# Altium PCB Copy of Arduino_Shield.PcbDoc
Units mil, origin at the board's own origin, x right, y up, seen from the top; angles counter-clockwise.
Board outline 2701 x 2043 mil, 2 copper layers (Top Layer, Bottom Layer); 21 components, 35 nets, 104 pads, 0 vias.
Unrouted connection lines stored in the file: 21.
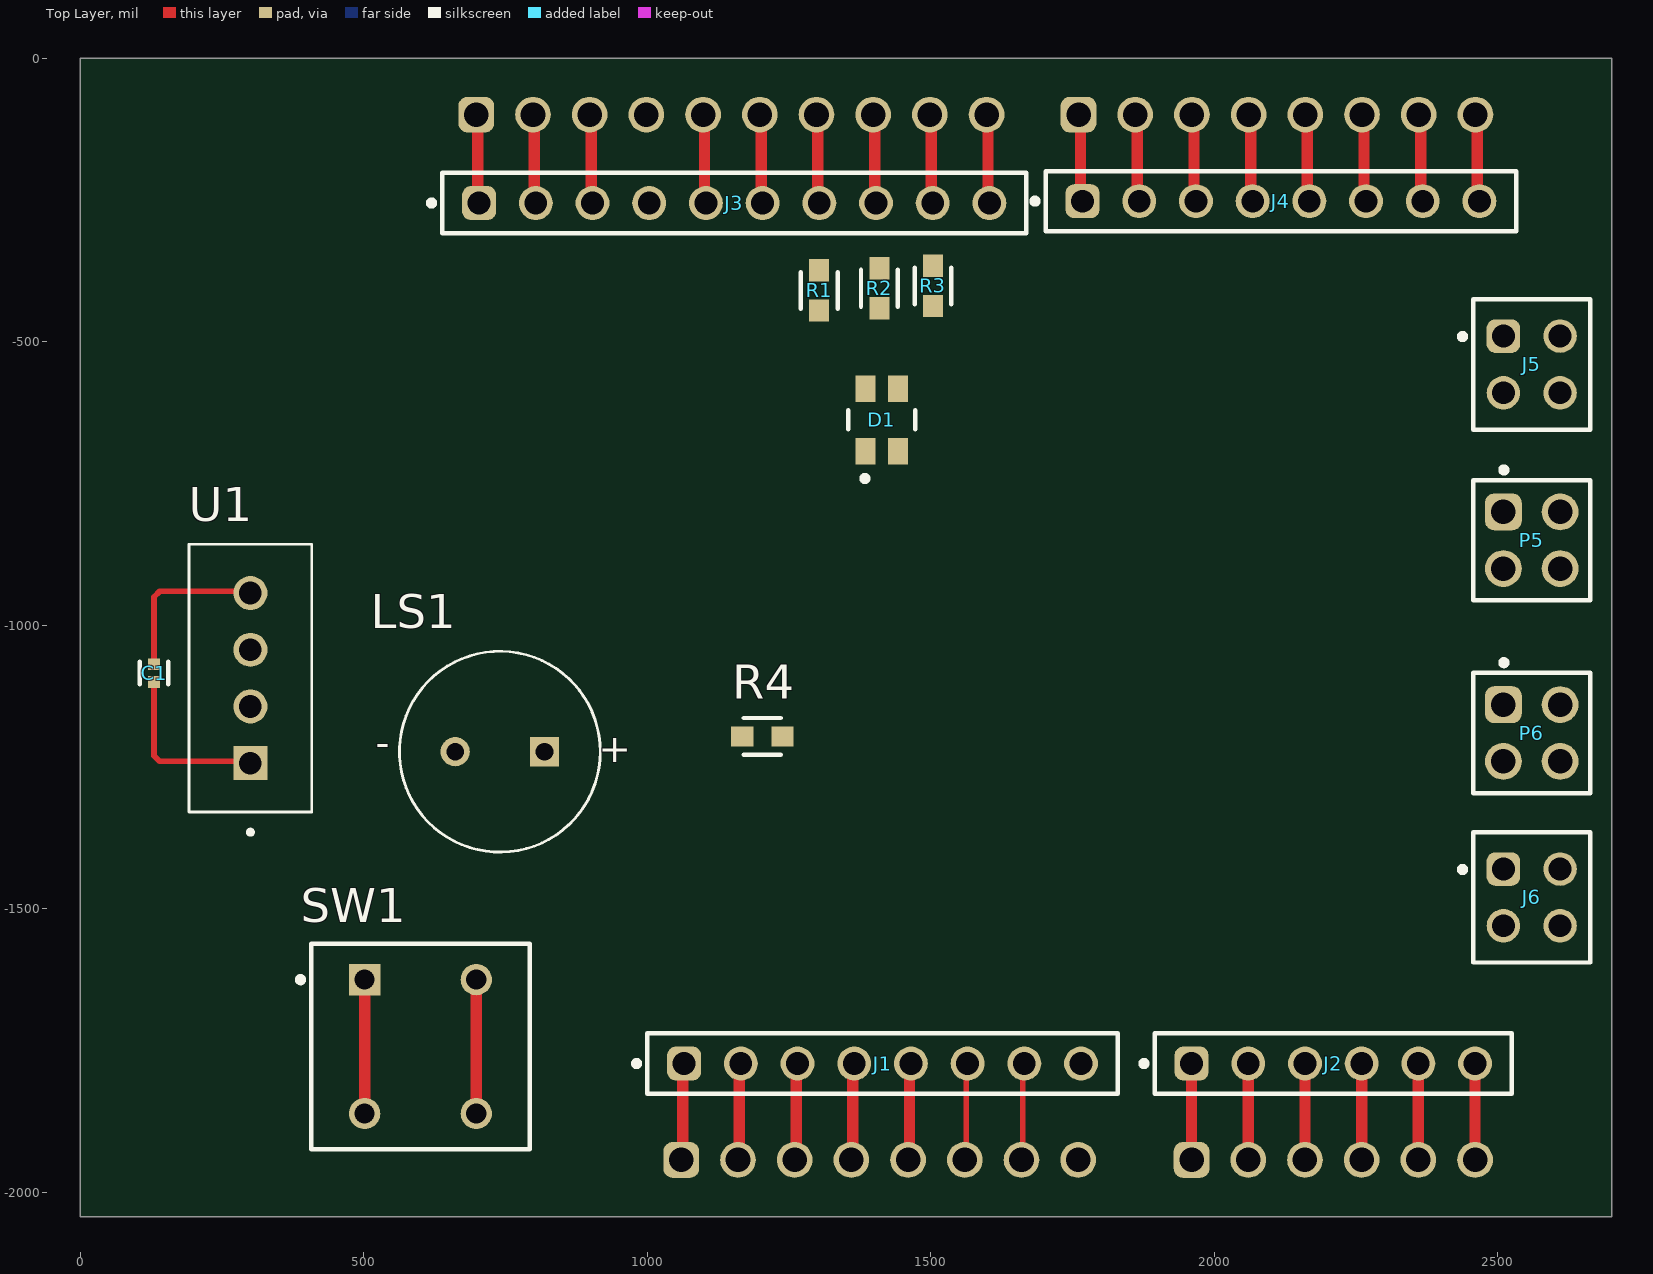
[diagram p0: Top Layer view]
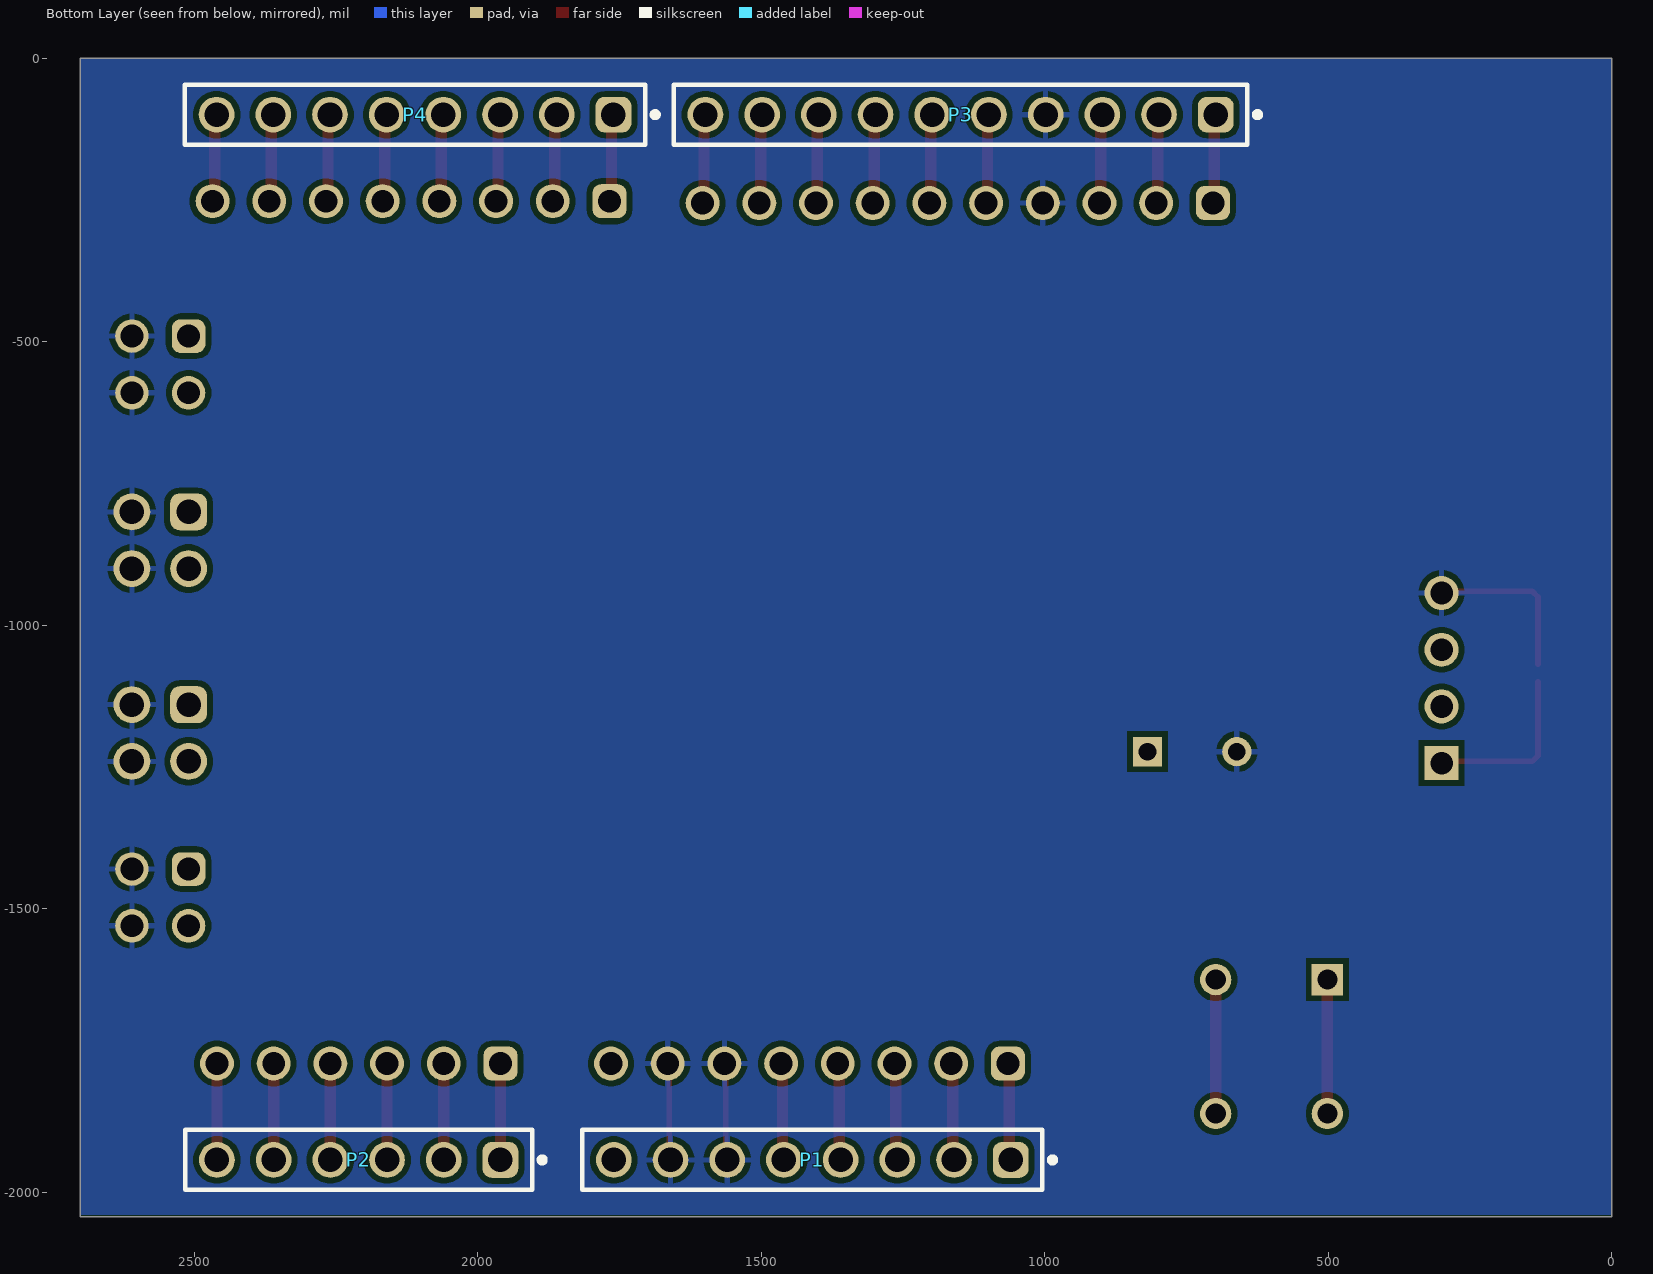
[diagram p1: Bottom Layer view, seen from below]

## Layer stack, top to bottom
Top Solder: solder mask 0.4, Solder Resist, Dk 3.5
Top Layer: signal copper 1.4
Dielectric 1: dielectric 12.6, FR-4, Dk 4.8
Bottom Layer: signal copper 1.4
Bottom Solder: solder mask 0.4, Solder Resist, Dk 3.5

## Board outline
0,-2043.2 0,-0.2 2701,-0.2 2701,-2043.2

## Design rules (kind name [scope] priority, off if disabled: settings)
Clearance [All] p1: gap=10 ignorepadtopadclearanceinfootprint=FALSE
PolygonConnect [All] p1: connectstyle=Relief reliefconductorwidth=10 reliefentries=4 polygonreliefangle="90 Angle" airgapwidth=10
RoutingVias [All] p1: holewidth=28 width=50 viastyle="Through Hole" minholewidth=28 minwidth=50 maxholewidth=28 maxwidth=50
SolderMaskExpansion [All] p1: expansion=4 istentingtop=FALSE
SupplyNets "Schematic Supply Nets_2" [InNet('3V3_OUT_ARD')] p1: voltage=0.000
SupplyNets "Schematic Supply Nets_1" [InNet('5V_OUT_ARD')] p2: voltage=0.000
SupplyNets "Schematic Supply Nets" [InNet('GND_ARD')] p3: voltage=0.000
Width [All] p1: maxlimit=20 minlimit=10 preferedwidth=10 minimp=50.000000 maximp=50.000000 favimp=50.000000
30 further rules are at their usual default settings.

## Components (designator, comment, footprint, x,y, rotation, side; value= is the part's Value field where it differs from the comment)
C1 "C0402C104K4RACAUTO" FP-C0402-BB-MFG 130,-1084.25 r90 top value="0.10 μF"
D1 "AAA3528LSEKJ3ZGKQBKS" FP-AAA3528LSEKJ3ZGKQBKS-MFG 1413.39,-637.8 r270 top
J1 "61300811821" 61300811821 1415,-1773 r0 top
J2 "61300611821" 61300611821 2210,-1773 r0 top
J3 "61301011821" 61301011821 1153.41,-255.31 r0 top
J4 "61300811821" 61300811821 2117.72,-251.97 r0 top
J5 "61300421821" 61300421821 2560,-540 r270 top
J6 "61300421821" 61300421821 2560,-1480 r270 top
LS1 "CST-951AP" CUI_CST-951AP 740,-1223 r180 top
P1 "61300811121" 61300811121 1410,-1943 r0 bottom
P2 "61300611121" 61300611121 2210,-1943 r0 bottom
P3 "61301011121" 61301011121 1148.43,-99.41 r0 bottom
P4 "61300811121" 61300811121 2110.63,-99.41 r0 bottom
P5 "61300421121" 61300421121 2560,-850 r270 top
P6 "61300421121" 61300421121 2560,-1190 r270 top
R1 "CPF0603F1K0C1" FP-CPF0603-MFG 1303.15,-409.45 r270 top value=1.0KΩ
R2 "CPF0603F1K0C1" FP-CPF0603-MFG 1409.45,-405.51 r270 top value=1.0KΩ
R3 "CPF0603F1K0C1" FP-CPF0603-MFG 1503.94,-401.57 r90 top value=1.0KΩ
R4 "CPF0603F1K0C1" FP-CPF0603-MFG 1203,-1196 r180 top value=1.0KΩ
SW1 "PVA1EEH11.2NV2" FP-PVA1EEH11_2NV2-MFG 600,-1743.2 r0 top
U1 "ADA386" XDCR_ADA386 300,-1093.2 r90 top

## Footprints (in the part's own frame and the unit in brackets; to place one, negate y for a bottom-side part, rotate by r counter-clockwise, add the part's x,y. Pads: shape width x height; smd on the part's side, far side on the other; paste and mask are expansions set on the pad)
61300421121 [mm] "Pin Header, pitch 2.54 mm, THT, Vertical, dual row, 4p"
  rrect50% 1.65x1.65 hole 1.1: 1(-1.27,-1.27)
  round 1.65 hole 1.1: 2(-1.27,1.27) 3(1.27,-1.27) 4(1.27,1.27)
  silkscreen extent -3.27,-2.62 2.69,2.62, body extent -2.54,-2.54 2.54,2.54, height 8.59
61300421821 [mm] "Socket Header, Pitch 2.54 mm, THT, Vertical, dual row, 4p"
  rrect50% 1.5x1.5 hole 1.02: 1(-1.27,-1.27)
  round 1.5 hole 1.02: 2(-1.27,1.27) 3(1.27,-1.27) 4(1.27,1.27)
  silkscreen extent -2.92,-3.22 2.92,2.62, body extent -2.79,-2.54 2.79,2.54, height 8.45
61300611121 [mm] "Pin Header, pitch 2.54 mm, THT, Vertical, single row, 6p"
  rrect50% 1.6x1.6 hole 1.1: 1(-6.35,0)
  round 1.6 hole 1.1: 2(-3.81,0) 3(-1.27,0) 4(1.27,0) 5(3.81,0) 6(6.35,0)
  silkscreen extent -8.34,-1.35 7.77,1.35, body extent -7.62,-1.27 7.62,1.27, height 8.57
61300611821 [mm] "Socket Header, Pitch 2.54 mm, THT, Vertical, single row, 6p"
  rrect50% 1.52x1.52 hole 1.02: 1(-6.35,0)
  round 1.52 hole 1.02: 2(-3.81,0) 3(-1.27,0) 4(1.27,0) 5(3.81,0) 6(6.35,0)
  silkscreen extent -8.6,-1.35 8,1.35, body extent -7.87,-1.25 7.87,1.25, height 8.55
61300811121 [mm] "Pin Header, pitch 2.54 mm, THT, Vertical, single row, 8p"
  rrect50% 1.6x1.6 hole 1.1: 1(-8.89,0)
  round 1.6 hole 1.1: 2(-6.35,0) 3(-3.81,0) 4(-1.27,0) 5(1.27,0) 6(3.81,0) 7(6.35,0) 8(8.89,0)
  silkscreen extent -10.88,-1.35 10.31,1.35, body extent -10.16,-1.27 10.16,1.27, height 8.57
61300811821 [mm] "Socket Header, Pitch 2.54 mm, THT, Vertical, single row, 8p"
  rrect50% 1.52x1.52 hole 1.02: 1(-8.89,0)
  round 1.52 hole 1.02: 2(-6.35,0) 3(-3.81,0) 4(-1.27,0) 5(1.27,0) 6(3.81,0) 7(6.35,0) 8(8.89,0)
  silkscreen extent -11.14,-1.35 10.54,1.35, body extent -10.41,-1.25 10.41,1.25, height 8.55
61301011121 [mm] "Pin Header, pitch 2.54 mm, THT, Vertical, single row, 10p"
  rrect50% 1.6x1.6 hole 1.1: 1(-11.43,0)
  round 1.6 hole 1.1: 2(-8.89,0) 3(-6.35,0) 4(-3.81,0) 5(-1.27,0) 6(1.27,0) 7(3.81,0) 8(6.35,0) 9(8.89,0) 10(11.43,0)
  silkscreen extent -13.42,-1.35 12.85,1.35, body extent -12.7,-1.27 12.7,1.27, height 8.57
61301011821 [mm] "Socket Header, Pitch 2.54 mm, THT, Vertical, single row, 10p"
  rrect50% 1.52x1.52 hole 1.02: 1(-11.43,0)
  round 1.52 hole 1.02: 2(-8.89,0) 3(-6.35,0) 4(-3.81,0) 5(-1.27,0) 6(1.27,0) 7(3.81,0) 8(6.35,0) 9(8.89,0) 10(11.43,0)
  silkscreen extent -13.68,-1.35 13.08,1.35, body extent -12.95,-1.25 12.95,1.25, height 8.55
CUI_CST-951AP [mm]
  round 1.308 hole 0.8: M(2,0)
  rect 1.308x1.308 / inner round 1.308 / far side rect 1.308x1.308 hole 0.8: P(-2,0)
  silkscreen extent -4.5,-4.5 4.5,4.5, body extent -4.5,-4.5 4.5,4.5, height 4.5
FP-AAA3528LSEKJ3ZGKQBKS-MFG [mm]
  rect 1.2x0.9 smd paste+0 mask+0: 1(1.4,-0.725) 2(-1.4,-0.725) 3(-1.4,0.725) 4(1.4,0.725)
  silkscreen extent -0.43,-1.5 2.75,1.5, body extent -2.1,-1.6 2.1,1.6, height 0.25
FP-C0402-BB-MFG [mm]
  rect 0.52x0.52 smd paste+0 mask+0: 1(-0.4,0) 2(0.4,0)
  silkscreen extent -0.5,-0.64 0.5,0.64, body extent -0.8,-0.4 0.8,0.4, height 0.25
FP-CPF0603-MFG [mm]
  rect 1x0.9 smd paste+0 mask+0: 1(-0.9,0) 2(0.9,0)
  silkscreen extent -0.82,-0.82 0.82,0.82, body extent -1.5,-0.55 1.5,0.55, height 0.25
FP-PVA1EEH11_2NV2-MFG [mm]
  rect 1.4x1.4 hole 0.9 paste-2539.97 mask+0: 1(-2.5,3)
  round 1.4 hole 0.9 paste-2539.97 mask+0: 1'(-2.5,-3) 2(2.5,3) 2'(2.5,-3)
  silkscreen extent -5.5,-4.6 4.9,4.6, body extent -5,-4.7 5,4.7, height 0.25
XDCR_ADA386 [mil]
  rect 60x60 hole 40: 1(-150,0)
  round 60 hole 40: 2(-50,0) 3(50,0) 4(150,0)
  silkscreen extent -276,-108 236,108

## Part data
C1: library part CMP-2008-03082-2, "CAP CER 0.1UF 16V X7R 0402", Capacitance="0.10 μF", Manufacturer=Kemet, Package=C0402-BB, Temperature="-55°C to +125°C", Temperature Characteristic=X7R, Temperature Coefficient=15%, Temperature Range High=+125°C, Temperature Range Low=-55°C, Tolerance=0.1, Voltage Rating="16 V", Automotive=No, Category=Cap, ComponentLink2Description=Datasheet, ComponentLink2URL=https://content.kemet.com/datasheets/KEM_C1002_X7R_SMD.pdf, Device Class L1="Passive Components", Device Class L2=Capacitors, Device Class L3="Ceramic Capacitors", Digikey Description="CAP CER 0.1UF 16V X7R 0402", Height=0.55mm, Ipc Land Pattern Name=CAPC10050X50, Lead Free=Yes, Manufacturer Part Number=C0402C104K4RACAUTO, Material=Ceramic, Mouser Description="Cap Ceramic 0.1uF 16V X7R 10% Pad SMD 0402 125C Automotive T/R", Octopart=https://octopart.com/c0402c104k4racauto-kemet-17309149, RoHS=TRUE
D1: library part CMP-44529-000057-1, "LED RGB CLEAR 4SMD", Case/Package=PLCC, Color=Blue, Forward Voltage=2.7V, Lens Color=Colorless, Test Current=2mA, Dominant Wavelength=465nm, Height=2.1mm, Length=3.2mm, Lens Transparency=Clear, Luminous Intensity=30mcd, Mount="Surface Mount", Packaging="Tape and Reel", RoHS Compliant=Yes, Viewing Angle=120°, Width=2.8mm
J1 J4: library part CMP-1502-01327-4, "Btb Conn, Rcpt, 8Pos, 1Row, 2.54Mm Rohs Compliant: Yes", Contact Resistance=20mΩ, Current Rating=3A, Operating Supply Voltage=250V, Gender=Female, Lead Pitch=2.54mm, Number of Pins=8, Orientation=Vertical, RoHS=Non-Compliant
J2: library part CMP-1502-01322-4, "THT Vertical Socket Header WR-PHD, Pitch 2.54 mm, Single Row, 6 pins", Contact Resistance=20mΩ, Current Rating=3A, Operating Supply Voltage=250V, Gender=Female, Lead Pitch=2.54mm, Number of Pins=6, Orientation=Vertical, RoHS=Compliant
J3: library part CMP-1502-01332-4, "THT Vertical Socket Header WR-PHD, Pitch 2.54 mm, Single Row, 10 pins", Color=Black, Contact Resistance=20mΩ, Current Rating=3A, Flammability Rating="UL94 V-0", Insulation Resistance=1GΩ, Max Operating Temperature=125°C, Min Operating Temperature=-40°C, Operating Supply Voltage=250V, Connector Type="Header, Socket", Contact Gender=Female, Contact Material=Copper, Contact Plating=Gold, Gender=Female, Height=8.5mm, Housing Material=PBT, Insulation=Insulated, Lead Free="Lead Free", Lead Pitch=2.54mm, Length=25.9mm, Mount="Through Hole", Number of Contacts=10, Number of Pins=10, Number of Positions=10, Number of Rows=1, Orientation=Vertical, Pitch=2.54mm, RoHS=Compliant, Termination="Through Hole", Voltage Rating=250V, Width=25.9mm
J5 J6: library part CMP-1502-01318-4, "THT Vertical Socket Header WR-PHD, Pitch 2.54 mm, Dual Row, 4 pins", Contact Resistance=20mΩ, Current Rating=3A, Operating Supply Voltage=250V, Gender=Female, Lead Pitch=2.54mm, Number of Pins=4, Orientation=Vertical
LS1: "9 mm, 5 V, 85 dB, Through Hole, Magnetic Audio Transducer Buzzer", Package=None, Check_prices=https://www.snapeda.com/parts/CST-951AP/Same+Sky/view-part/?ref=eda, MF="Same Sky", MP=CST-951AP, SnapEDA_Link=https://www.snapeda.com/parts/CST-951AP/Same+Sky/view-part/?ref=snap
P1 P4: library part CMP-1502-01076-4, "THT Vertical Pin Header WR-PHD, Pitch 2.54 mm, Single Row, 8 pins", Color=Black, Contact Resistance=20mΩ, Current Rating=3A, Max Operating Temperature=105°C, Min Operating Temperature=-40°C, Operating Supply Voltage=250V, Connector Type="Male Pin", Contact Material=Gold, Contact Mating Length=5.9944mm, Contact Plating=Gold, Gender=Male, Height=8.54mm, Lead Pitch=2.54mm, Mount="Through Hole", Number of Contacts=8, Number of Pins=8, Number of Positions=8, Number of Rows=1, Orientation=Vertical, Packaging=Bulk, Pitch=2.54mm, RoHS=Compliant, Termination=Solder, Voltage Rating=250V
P2: library part CMP-1502-01070-4, "THT Vertical Pin Header WR-PHD, Pitch 2.54 mm, Single Row, 6 pins", Color=Black, Contact Resistance=20mΩ, Current Rating=3A, Max Operating Temperature=105°C, Min Operating Temperature=-40°C, Operating Supply Voltage=250V, Connector Type="Male Pin", Contact Gender=Male, Contact Material=Gold, Contact Mating Length=5.9944mm, Contact Plating=Gold, Gender=Male, Height=8.89mm, Housing Material=PBT, Lead Free="Lead Free", Lead Pitch=2.54mm, Mount="Through Hole", Number of Contacts=6, Number of Pins=6, Number of Positions=6, Number of Rows=1, Orientation=Vertical, Packaging=Bulk, Pitch=2.54mm, RoHS=Compliant, Termination="Through Hole", Voltage Rating=250V
P3: library part CMP-1502-01082-6, "THT Vertical Pin Header WR-PHD, Pitch 2.54 mm, Single Row, 10 pins", Color=Black, Contact Resistance=20mΩ, Current Rating=3A, Flammability Rating="UL94 V-0", Insulation Resistance=1GΩ, Max Operating Temperature=105°C, Min Operating Temperature=-40°C, Operating Supply Voltage=250V, Connector Type="Male Pin", Contact Gender=Male, Contact Material=Gold, Contact Mating Length=5.9944mm, Contact Plating=Gold, Gender=Male, Height=8.74mm, Housing Material=PBT, Lead Pitch=2.54mm, Length=2.54mm, Mount="Through Hole", Number of Contacts=10, Number of Pins=10, Number of Positions=10, Number of Rows=1, Orientation=Vertical, Packaging=Bulk, Pitch=2.54mm, RoHS=Compliant, Termination=Solder, Voltage Rating=250V, Width=25.4mm
P5 P6: library part CMP-1502-01066-5, "THT Vertical Pin Header WR-PHD, Pitch 2.54 mm, Dual Row, 4 pins", Color=Black, Contact Resistance=20mΩ, Current Rating=3A, Max Operating Temperature=105°C, Min Operating Temperature=-40°C, Operating Supply Voltage=250V, Connector Type="Male Pin", Contact Material=Gold, Contact Mating Length=5.9944mm, Contact Plating=Gold, Gender=Male, Height=8.89mm, Lead Free="Lead Free", Lead Pitch=2.54mm, Mount="Through Hole", Number of Contacts=4, Number of Pins=4, Number of Positions=4, Number of Rows=2, Orientation=Vertical, Packaging=Bulk, Pitch=2.54mm, RoHS=Compliant, Row Spacing=2.54mm, Termination=Solder, Voltage Rating=250V
R1 R2 R3 R4: library part CMP-03211-002621-1, "RES SMD 1.0KΩ 1% 1/16W 0603", Manufacturer="TE Connectivity", Package=CPF0603, Power Rating=0.063W, Resistance=1.0KΩ, Temperature="-55°C to +155°C", Temperature Coefficient=50ppm/°C, Temperature Range High=+155°C, Temperature Range Low=-55°C, Tolerance=1%, Voltage Rating=50V, Automotive=No, Category=Res, ComponentLink2Description=Datasheet, ComponentLink2URL=https://www.te.com/commerce/DocumentDelivery/DDEController?Action=showdoc&DocId=Data+Sheet%7F1773200%7FM%7Fpdf%7FEnglish%7FENG_DS_1773200_M.pdf%7F3-1676481-2, Composition="Thin Film", Device Class L1="Passive Components", Device Class L2=Resistors, Device Class L3="Chip SMD Resistors", Height=0.55mm, Ipc Land Pattern Name=RESC15580X45, Lead Free=Yes, Manufacturer Part Number=CPF0603F1K0C1, Octopart=https://octopart.com/cpf0603f1k0c1-te+connectivity-42013134, octopart_url=https://octopart.com/cpf0603f1k0c1-te+connectivity-42013134, Packaging="1k Reel", RoHS=TRUE, Series=CPF
SW1: library part CMP-10035-000009-1, "SWITCH PUSH DPST 0.1A 32V", Current Rating=100mA, Max Operating Temperature=85°C, Min Operating Temperature=-40°C, Voltage Rating (DC)=32V, Electrical Life=100000Cycles, Mount="Through Hole", Packaging=Bulk, RoHS Compliant=Yes, Series=PVA, Switch Function=Off-On, Termination="PC Pin", Throw Configuration=DPST
U1: "DHT11 basic temperature-humidity sensor + extras", Package=None, Availability=Unavailable, MF="Adafruit Industries", MP=ADA386, Price=None, SnapEDA_Link=https://www.snapeda.com/parts/ADA386/Adafruit%20Industries/view-part/106068/?ref=snap

## Nets (pads, with @x,y where several pads share a name; then routed paths per layer and width w, separated by ;. In a path a pad name is that pad's centre, name@x,y a point inside that pad or via, vN(x,y) a via of type N, cw(c..) or ccw(c..) an arc to the next point about the centre after c; other vN are vias at no path point)
3V3_OUT_ARD: J1.4 J6.1 J6.3 P1.4 P6.1 P6.3 | length 172.1
  Top Layer w20: P1.4 1362.5,-1940.5 1362.5,-1775.5 J1.4
5V_OUT_ARD: C1.1 J1.5 J5.1 J5.3 P1.5 P5.1 P5.3 U1.1 | length 477.5
  Top Layer w10: C1.1 130,-1230 140,-1240 296.8,-1240 U1.1
  Top Layer w20: P1.5 1462.5,-1940.5 1462.5,-1775.5 J1.5
AD3/PD3: J4.5 P4.5 | length 155.5
  Top Layer w20: P4.5 2164.17,-102.95 2164.17,-248.43 J4.5
AD5/PD5: J4.3 P4.3 | length 155.5
  Top Layer w20: P4.3 1964.17,-102.95 1964.17,-248.43 J4.3
AD6/PD6: J4.2 P4.2 | length 155.5
  Top Layer w20: P4.2 1864.17,-102.95 1864.17,-248.43 J4.2
AD9/PB1: J3.9 P3.9 R3.1 | length 158
  Top Layer w20: P3.9 1500.92,-101.9 1500.92,-252.82 J3.9
AD10/PB2/SS: J3.8 P3.8 R2.1 | length 158
  Top Layer w20: P3.8 1400.92,-101.9 1400.92,-252.82 J3.8
AD11/PB3/MOSI: J3.7 P3.7 R1.1 | length 158
  Top Layer w20: P3.7 1300.92,-101.9 1300.92,-252.82 J3.7
ADC0/PC0/D14/A0: J2.1 P2.1 U1.2 | length 170
  Top Layer w20: P2.1 J2.1
ADC1/PC1/D15/A1: J2.2 P2.2 | length 170
  Top Layer w20: P2.2 J2.2
ADC2/PC2/D16/A2: J2.3 P2.3 | length 170
  Top Layer w20: P2.3 J2.3
ADC3/PC3/D17/A3: J2.4 P2.4 | length 170
  Top Layer w20: P2.4 J2.4
ADC4/PC4/D18/A4: J2.5 P2.5 | length 170
  Top Layer w20: P2.5 J2.5
ADC5/PC5/D19/A5: J2.6 P2.6 | length 170
  Top Layer w20: P2.6 J2.6
AREF: J3.3 P3.3 | length 158
  Top Layer w20: P3.3 900.92,-101.9 900.92,-252.82 J3.3
D0/RX/PD0: J4.8 P4.8 | length 155.5
  Top Layer w20: P4.8 2464.17,-102.95 2464.17,-248.43 J4.8
D1/TX/PD1: J4.7 P4.7 | length 155.5
  Top Layer w20: P4.7 2364.17,-102.95 2364.17,-248.43 J4.7
D2/PD2: J4.6 P4.6 | length 155.5
  Top Layer w20: P4.6 2264.17,-102.95 2264.17,-248.43 J4.6
D4/PD4: J4.4 P4.4 | length 155.5
  Top Layer w20: P4.4 2064.17,-102.95 2064.17,-248.43 J4.4
D7/PD7: J4.1 P4.1 R4.1 | length 155.5
  Top Layer w20: P4.1 1764.17,-102.95 1764.17,-248.43 J4.1
D8/PB0: J3.10 P3.10 | length 158
  Top Layer w20: P3.10 1600.92,-101.9 1600.92,-252.82 J3.10
D12/PB4/MISO: J3.6 P3.6 | length 158
  Top Layer w20: P3.6 1200.92,-101.9 1200.92,-252.82 J3.6
D13/PB5/SCK: J3.5 P3.5 | length 158
  Top Layer w20: P3.5 1100.92,-101.9 1100.92,-252.82 J3.5
D18/PC4/SDA: J3.2 P3.2 | length 158
  Top Layer w20: P3.2 800.92,-101.9 800.92,-252.82 J3.2
D19/PC5/SCL: J3.1 P3.1 | length 158
  Top Layer w20: P3.1 700.92,-101.9 700.92,-252.82 J3.1
GND_ARD: C1.2 D1.2 J1.6 J1.7 J3.4 J5.2 J5.4 J6.2 J6.4 LS1.M P1.6 P1.7 P3.4 P5.2 P5.4 P6.2 P6.4 U1.4 | length 638.1
  Top Layer w10: C1.2 130,-950 140,-940 296.8,-940 U1.4 ; P1.6 1562.5,-1940.5 1562.5,-1775.5 J1.6 ; P1.7 1662.5,-1940.5 1662.5,-1775.5 J1.7
IOREF: J1.2 P1.2 | length 172.1
  Top Layer w20: P1.2 1162.5,-1940.5 1162.5,-1775.5 J1.2
NC: J1.1 P1.1 | length 172.1
  Top Layer w20: P1.1 1062.5,-1940.5 1062.5,-1775.5 J1.1
NetD1_1: D1.1 R1.2
NetD1_3: D1.3 R2.2
NetD1_4: D1.4 R3.2
NetLS1_P: LS1.P R4.2
PC6/RST: J1.3 P1.3 | length 172.1
  Top Layer w20: P1.3 1262.5,-1940.5 1262.5,-1775.5 J1.3
SW_1: P1.8 SW1.1 SW1.1' | length 236.2
  Top Layer w20: SW1.1' SW1.1
SW_2: J1.8 SW1.2 SW1.2' | length 236.2
  Top Layer w20: SW1.2' SW1.2
pads on no net: U1.3

## Polygon pours and split planes (outlines as drawn)
GND_ARD on Bottom Layer "GND_ARD_L02_P000" (solid, pour order 0): 0,0 0,-2040 2700,-2040 2700,0

## Dimensions
0,0 to 2460.63,236.22 on Mechanical 1
0,0 to 86.61,-99.41 on Mechanical 1
0,-2043.2 to 1758.86,-2187.68 on Mechanical 1
-7.87,-2043 to -15.75,-1943.59 on Mechanical 1
0,-2043.2 to 2460,-2143 on Mechanical 1

## Text inside footprints (layer, text, board x,y; h text height)
LS1: Top Overlay "-" at 546.09,-1194.31 h50.14 r180; Top Overlay "+" at 971.69,-1199.32 h50.13 r180